# Altium PCB Fuente.PcbDoc
Units mm, origin at the board's own origin, x right, y up, seen from the top; angles counter-clockwise.
Board outline 100 x 100 mm, 2 copper layers (Top Layer, Bottom Layer); 53 components, 29 nets, 133 pads, 32 vias.
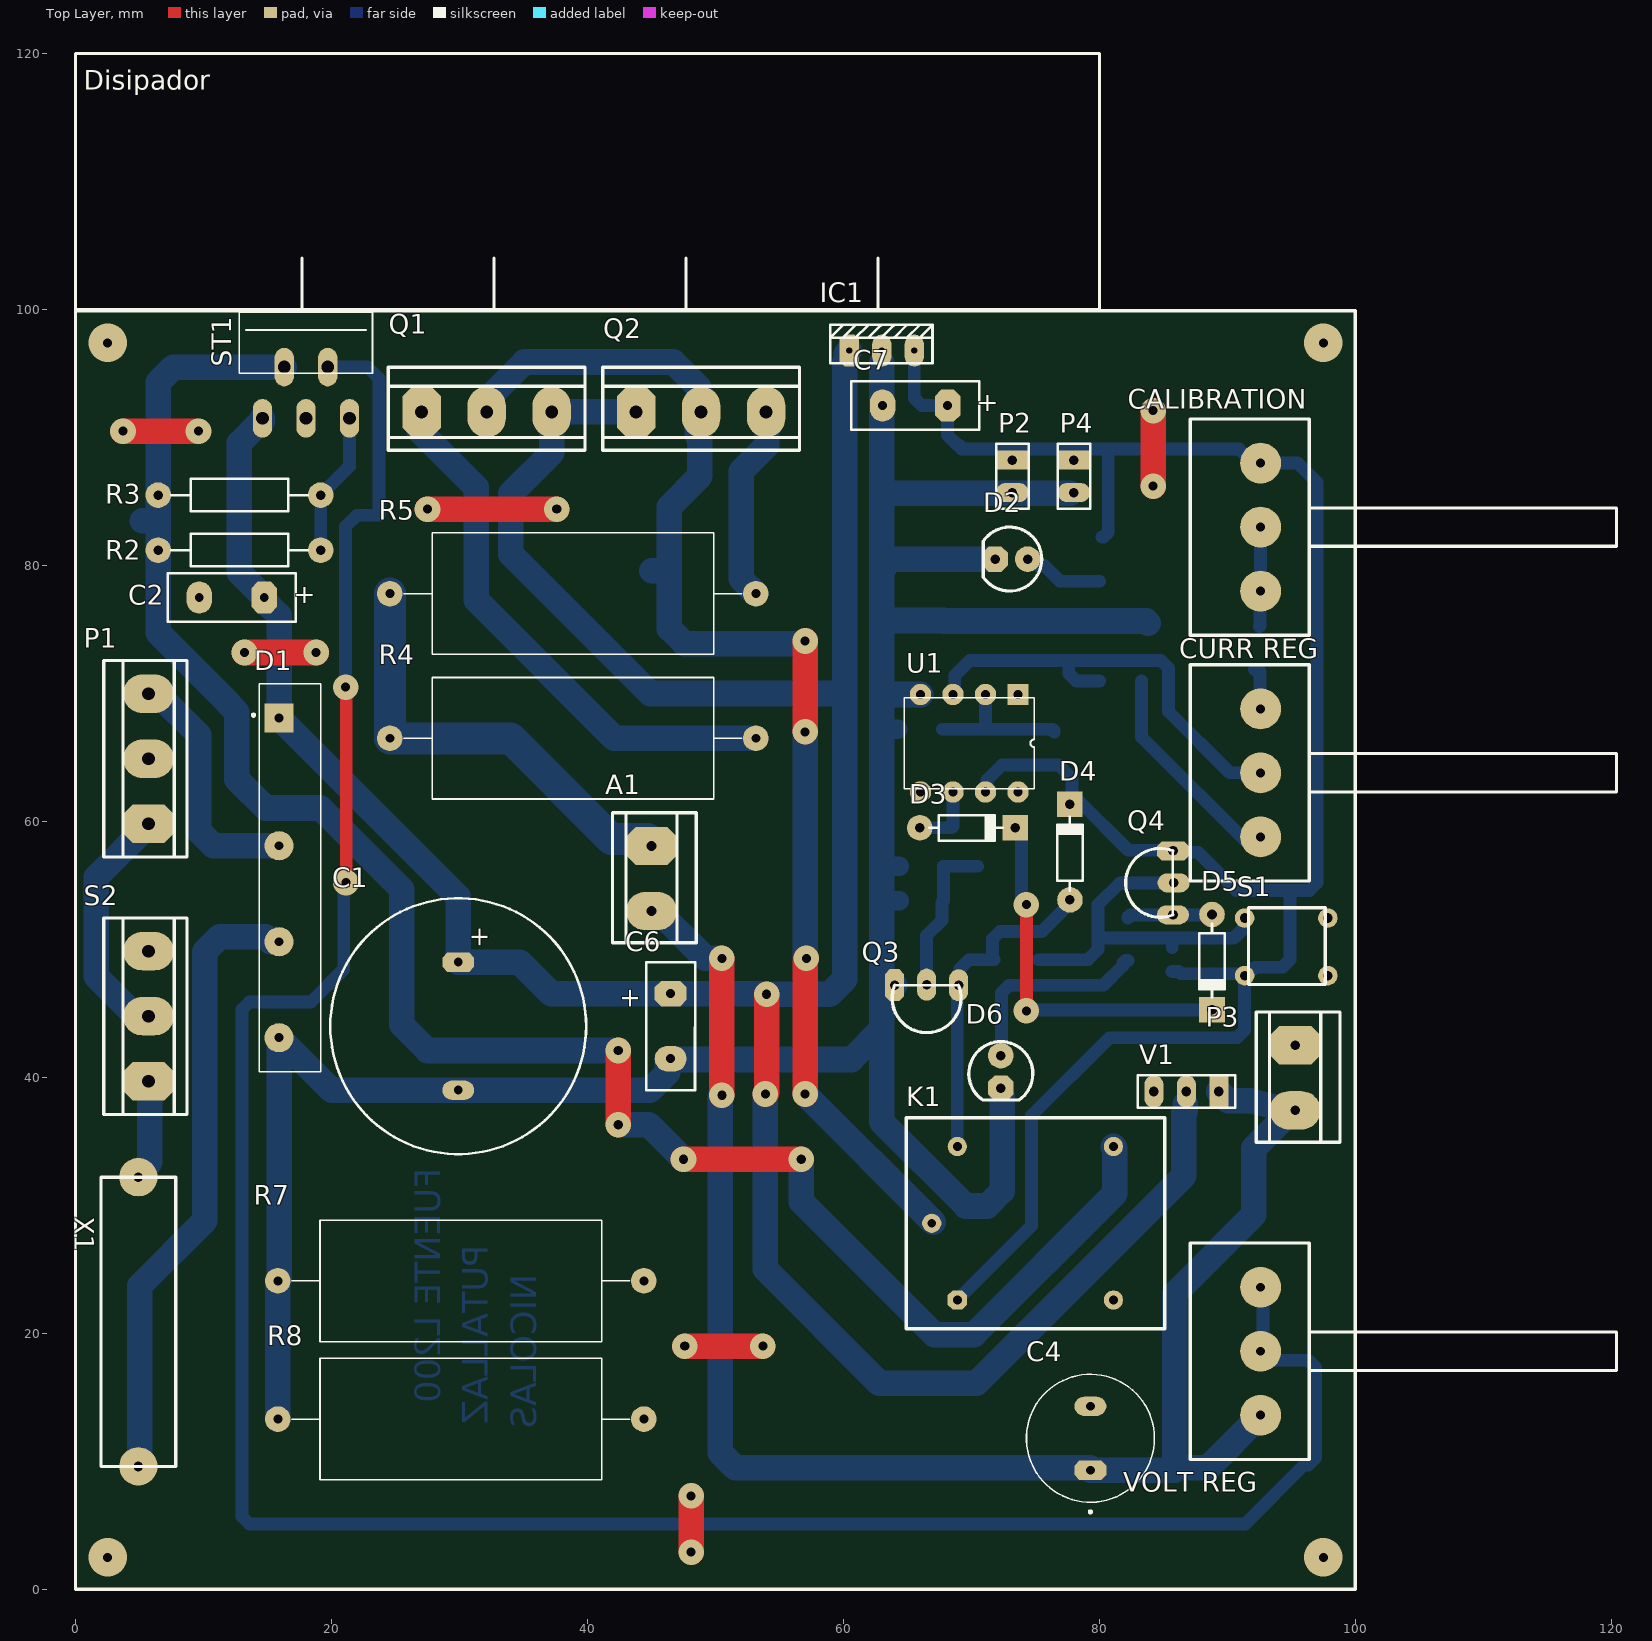
[diagram p0: Top Layer view]
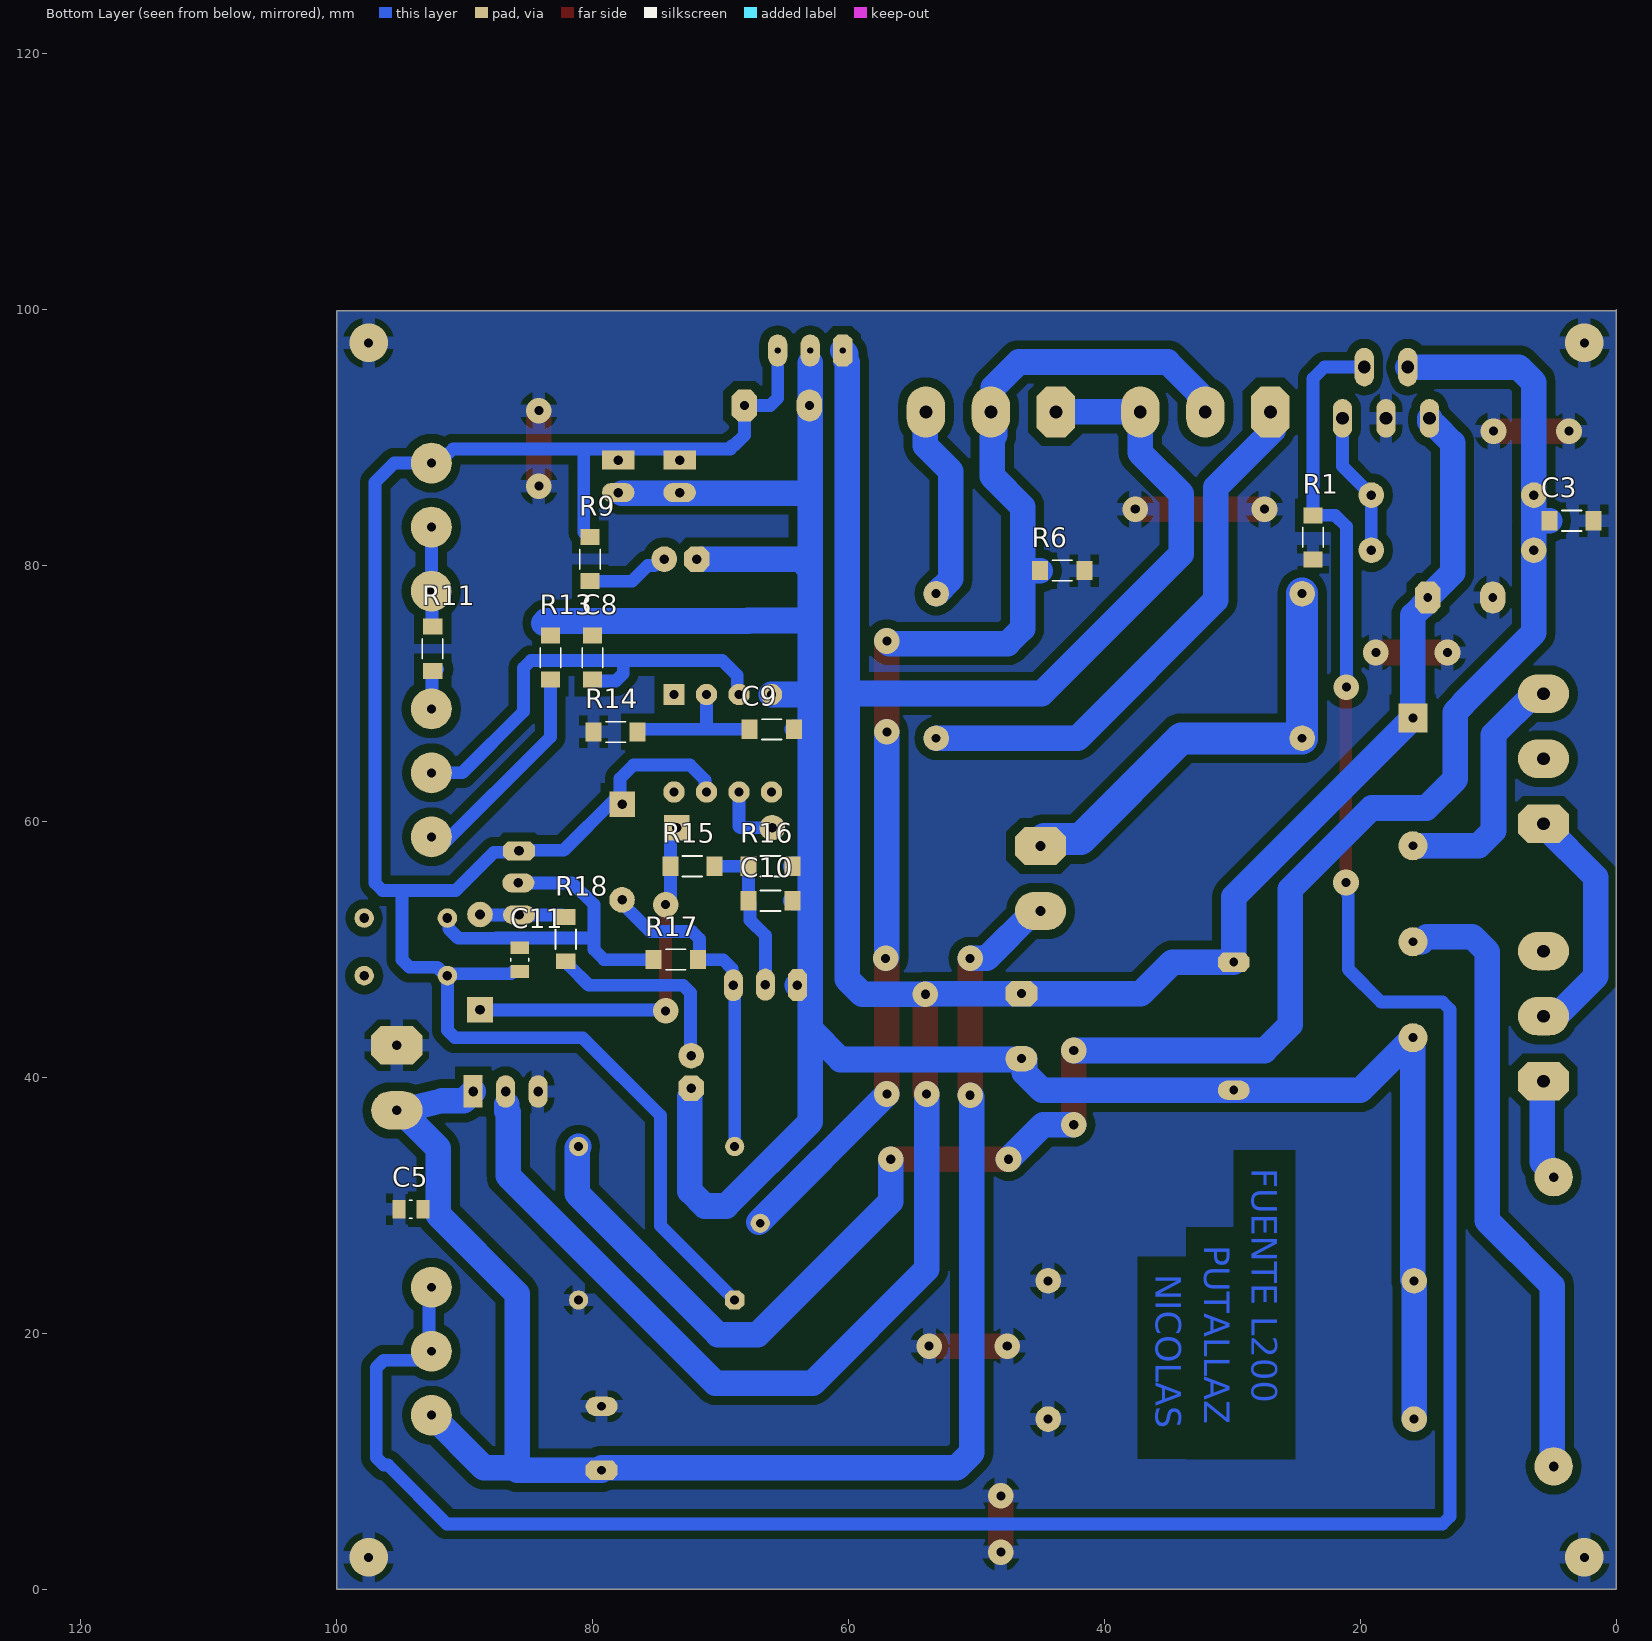
[diagram p1: Bottom Layer view, seen from below]
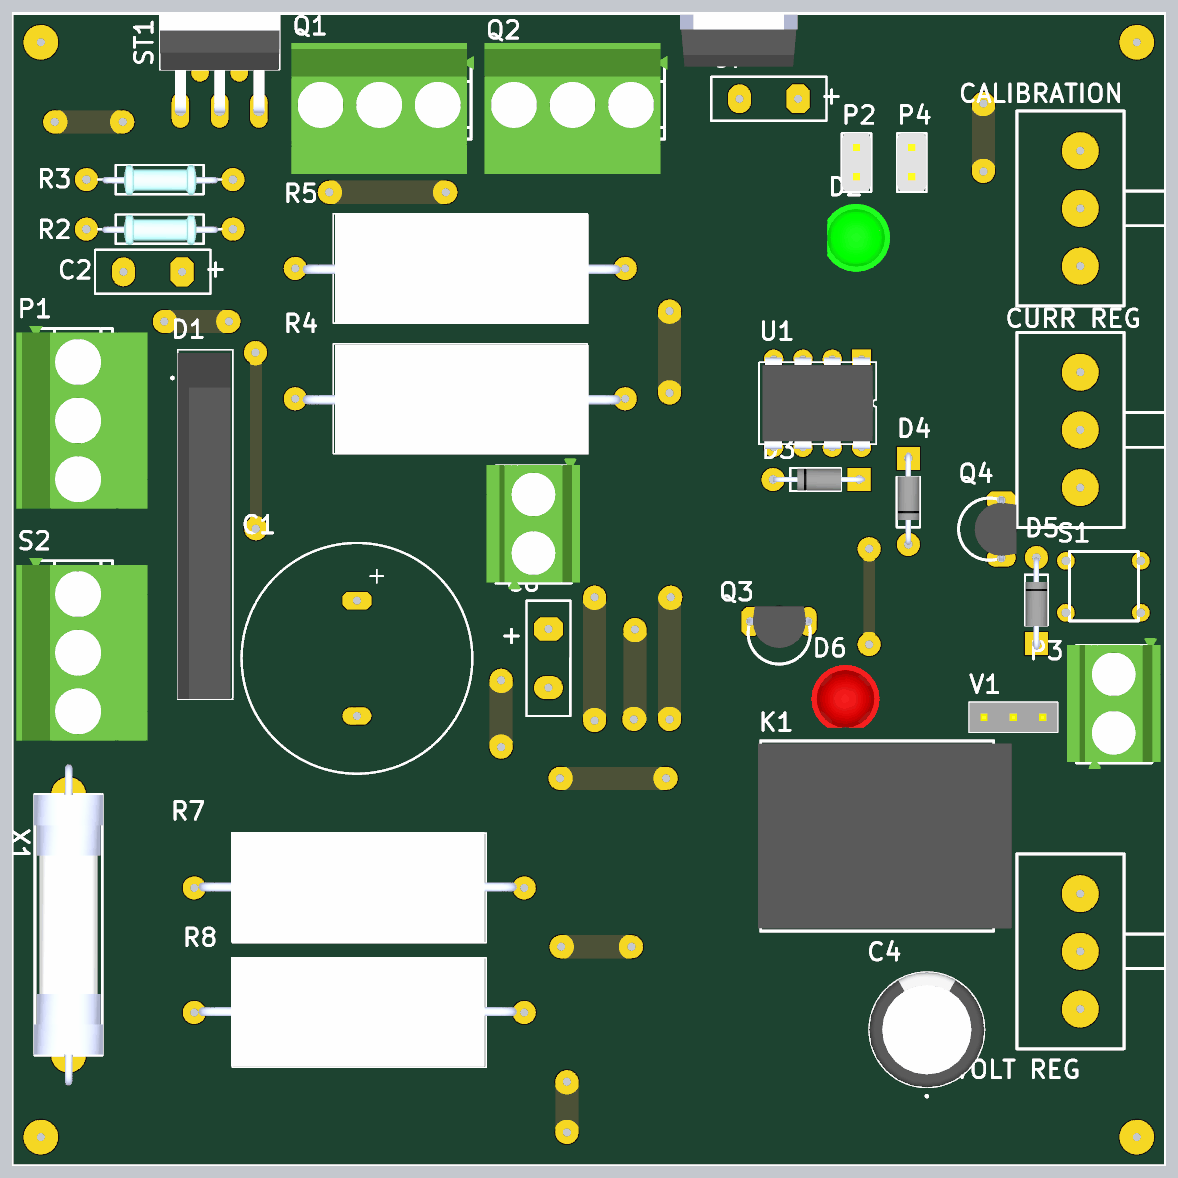
[diagram p2: 3D render of the assembled board from above, using the file's embedded part models]
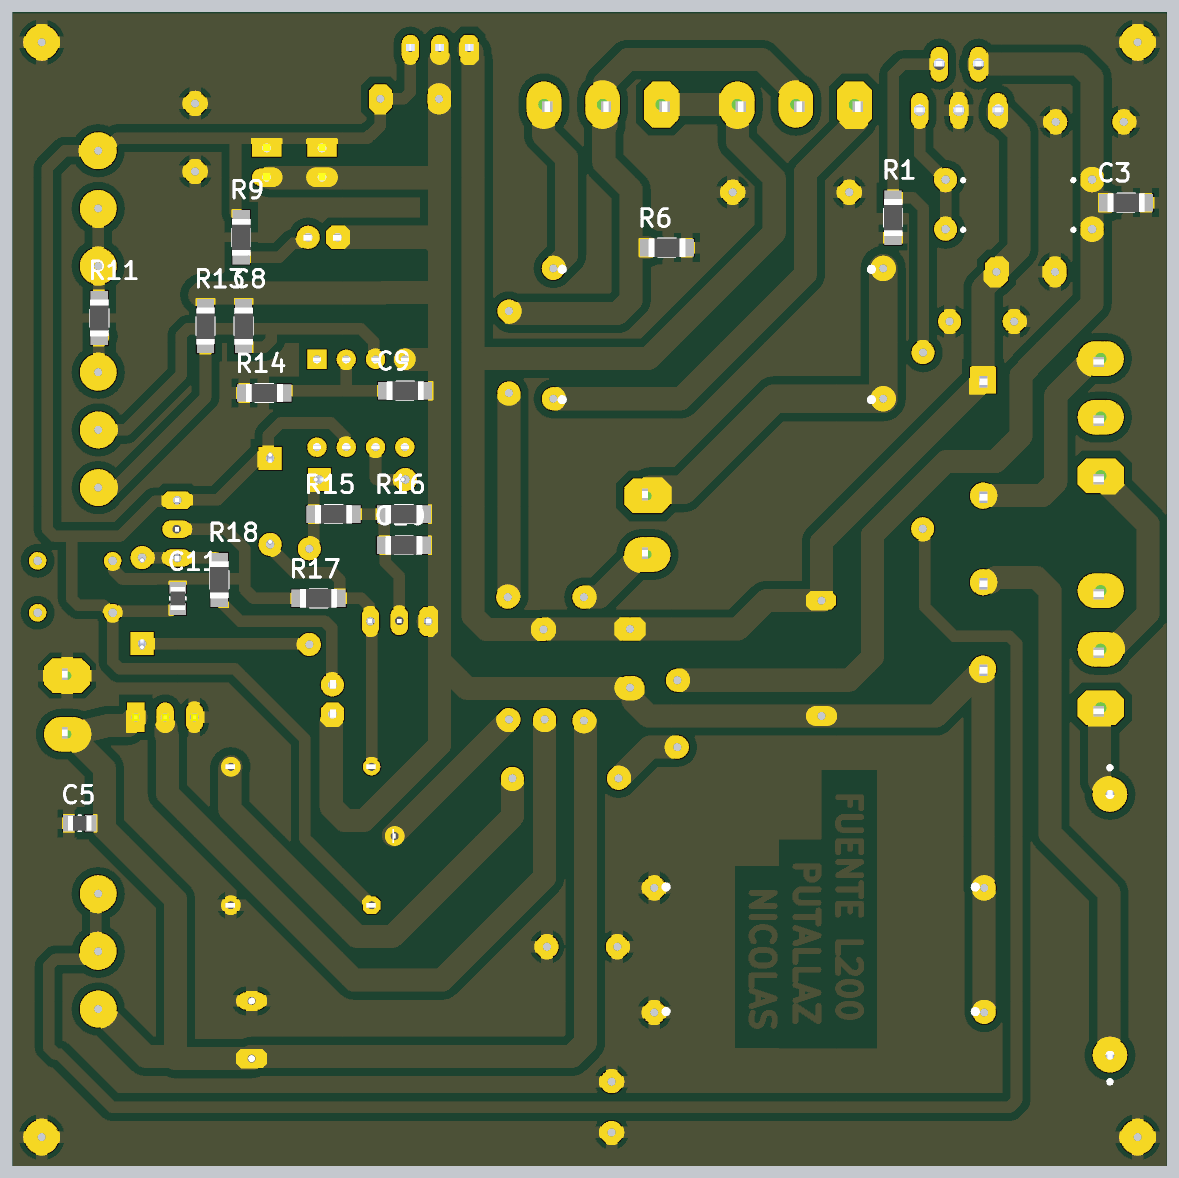
[diagram p3: 3D render of the assembled board from below, using the file's embedded part models]

## Layer stack, top to bottom
Top Solder: solder mask 0.0102, Solder Resist, Dk 3.5
Top Layer: signal copper 0.0356
Dielectric 1: dielectric 0.32, FR-4, Dk 4.8
Bottom Layer: signal copper 0.0356
Bottom Solder: solder mask 0.0102, Solder Resist, Dk 3.5

## Board outline
0,0 0,100 0,99.9 100,99.9 100,0

## Design rules (kind name [scope] priority, off if disabled: settings)
Clearance pistasGruesas [(InNet('GND') OR InNet('-VCC') OR InNet('VCC') OR InNet('VOUT') OR InNet('VREG') OR InNet('L IN') OR InNet('N IN') OR InNet('AMP IN') OR InNet('B BJT') OR InNet('E1') OR InNet('E2'))] p1: gap=0.7 ignorepadtopadclearanceinfootprint=TRUE
Clearance Polygon [InPolygon] p2: gap=1 ignorepadtopadclearanceinfootprint=TRUE
Clearance Clearance_1 [All] p3: gap=0.254 ignorepadtopadclearanceinfootprint=FALSE except(0: Arc-Hole Track-Hole SMDPad-Hole THPad-Hole Via-Hole Fill-Hole Poly-Hole Region-Hole Text-Hole)
Clearance [All] p4: gap=0.254 ignorepadtopadclearanceinfootprint=FALSE except(0: Arc-Hole Track-Hole SMDPad-Hole THPad-Hole Via-Hole Fill-Hole Poly-Hole Region-Hole Text-Hole)
Height [All] p1: minheight=0 maxheight=50 prefheight=12.7
PolygonConnect [All] p1: connectstyle=Relief reliefconductorwidth=1 reliefentries=4 polygonreliefangle="90 Angle" airgapwidth=0.5
RoutingVias [All] p1: holewidth=0.711 width=2 viastyle="Through Hole" minholewidth=0.711 minwidth=2 maxholewidth=0.711 maxwidth=2
SolderMaskExpansion [All] p1: expansion=0.102 istentingtop=FALSE
UnRoutedNet [All] p1: checkbadconnections=TRUE
Width POWER_NET [(InNet('GND') OR InNet('-VCC') OR InNet('VCC') OR InNet('VOUT') OR InNet('VREG') OR InNet('L IN') OR InNet('N IN') OR InNet('AMP IN') OR InNet('B BJT') OR InNet('E1') OR InNet('E2') OR InNet('NetS2_2') OR InNet('NetP1_1') OR InNet('NetS2_1'))] p1: maxlimit=3 minlimit=1.5 preferedwidth=2
Width CONTROL_NET [All] p2: maxlimit=2 minlimit=0.7 preferedwidth=1
28 further rules are at their usual default settings.

## Components (designator, comment, footprint, x,y, rotation, side; value= is the part's Value field where it differs from the comment)
A1 "Amperimetro" "BORNERA 2" 45,58.08 r270 top
C1 "4700uF 50V" "CAP 20MM" 29.9,44 r90 top
C2 "Tantalio" "Cap Tantalio" 12.2,77.5 r180 top value="1uF 40V"
C3 "220nF" "1206 res" 3.5,83.5 r0 bottom
C4 "470uF 50V" "CAP 10mm" 79.3,11.8 r90 top
C5 "100nF" "0805 res" 94.2,29.7 r180 bottom
C6 "Tantalio" "Cap Tantalio" 46.5,44 r270 top value="1uF 40V"
C7 "Tantalio" "Cap Tantalio" 65.6,92.5 r180 top value="10uF 25V"
C8 "220nF" "1206 res" 80,72.8 r270 bottom
C9 "220nF" "1206 res" 66,67.2 r0 bottom
C10 "220nF" "1206 res" 66.1,53.8 r0 bottom
C11 "100nF" "0805 res" 85.7,49.2 r270 bottom
CALIBRATION "100K" Potenciometro 92.6,83 r0 top
"CURR REG" "10K" Potenciometro 92.6,63.8 r0 top
D1 "GBJ2510" DIOB_GBJ2510 16.75,55.6 r270 top
D2 "GREEN" "LED 5MM GREEN" 74.4,80.5 r180 top
D3 "1N4148" DO-38 69.7,59.5 r0 top
D4 "1N4148" DO-38 77.7,57.6 r90 top
D5 "1N4148" DO-38 88.8,49 r270 top
D6 "RED" "LED 5MM" 72.3,41.7 r270 top
IC1 "LM7812" TO220 63,94.3 r0 top
K1 "Relay-SPDT" Relay 66.9,28.6 r0 top
P1 "Trafo 18V" "Bornera 3" 5.7,64.9 r90 top
P2 "Ventilador A" HDR1X2 73.2,88.24 r270 top
P3 "OUT 2.8-24V" "BORNERA 2" 95.3,42.5 r270 top
P4 "Ventilador B" HDR1X2 78,88.24 r270 top
Q1 "2N3771" "Bornera 3" 32.12,92 r0 top
Q2 "2N3771" "Bornera 3" 48.88,92 r0 top
Q3 "BC547" TO-92A 66.5,44.5 r90 top
Q4 "BC557" TO-92A 83.05,55.2 r0 top
R1 "1K3" "1206 res" 23.7,82.2 r90 bottom
R2 "0.51ohm" "Res Axial 0.5" 12.8,81.2 r180 top
R3 "0.51ohm" "Res Axial 0.5" 12.8,85.5 r180 top
R4 "0.1ohm" "RES AXIAL 5W" 38.854,66.5 r180 top
R5 "0.1ohm" "RES AXIAL 5W" 38.854,77.8 r180 top
R6 "1K" "1206 res" 43.3,79.6 r0 bottom
R7 "0.12ohm" "RES AXIAL 5W" 30.1,24.1 r0 top value=5W
R8 "0.12ohm" "RES AXIAL 5W" 30.1,13.3 r0 top value=5W
R9 "680ohm" "1206 res" 80.2,80.5 r90 bottom
R11 "180K" "1206 res" 92.5,73.5 r90 bottom
R13 "100ohm" "1206 res" 83.3,72.8 r270 bottom
R14 "47K" "1206 res" 78.2,67 r0 bottom
R15 "10K" "1206 res" 72.2,56.5 r180 bottom
R16 "2k2" "1206 res" 66.1,56.5 r0 bottom
R17 "1K" "1206 res" 73.5,49.2 r0 bottom
R18 "680ohm" "1206 res" 82.1,50.8 r90 bottom
S1 "SW-PB" Pulsador 94.6,50.2 r0 top
S2 "SW-SPDT" "Bornera 3" 5.7,44.78 r90 top
ST1 "L200" PENTAWATT 18,91.5 r0 top
U1 "Amplificador Operacional" DIP8 66.02,62.3 r270 top
V1 "Voltimetro" HDR1X3 89.34,38.9 r180 top
"VOLT REG" "Pote Lineal" Potenciometro 92.6,18.6 r0 top
X1 "Fuse" Fusiblera 4.9,20.9 r270 top

## Footprints (in the part's own frame and the unit in brackets; to place one, negate y for a bottom-side part, rotate by r counter-clockwise, add the part's x,y. Pads: shape width x height; smd on the part's side, far side on the other; paste and mask are expansions set on the pad)
"0805 res" [mm]
  rect 1x1.42 smd: 1(-0.935,0) 2(0.935,0)
  silkscreen extent -0.12,-0.7 0.12,0.7, body extent -1,-0.63 1,0.63, height 0.6
"1206 res" [mm]
  rect 1.25x1.5 smd: 1(-1.725,0) 2(1.725,0)
  silkscreen extent -0.78,-0.8 0.78,0.8, body extent -1.6,-0.8 1.6,0.8, height 0.6
"BORNERA 2" [mm]
  oct 3x4 hole 0.75: 1(0,0)
  oval 3x4 hole 0.75: 2(5.08,0)
  silkscreen extent -2.6,-3.05 7.56,3.5, body extent -3.26,-3.85 8.1,4.25, height 10
"Bornera 3" [mm]
  oct 3x4 hole 1: 1(-5.08,0)
  oval 3x4 hole 1: 2(0,0) 3(5.08,0)
  silkscreen extent -7.68,-3 7.68,3.5, body extent -7.91,-6.03 7.93,5.32, height 18
"CAP 10mm" [mm]
  oct 1.5x2.5 hole 0.7: 1(-2.5,0)
  oval 1.5x2.5 hole 0.7: 2(2.5,0)
  silkscreen extent -5.85,-5 5,5, body extent -5,-5 5,5, height 20
"CAP 20MM" [mm] "Polarized Capacitor (Radial); 2 Leads"
  oct 1.5x2.5 hole 0.7: 1(5,0)
  oval 1.5x2.5 hole 0.7: 2(-5,0)
  silkscreen extent -10,-10 10,10, body extent -10,-9.99 10,9.99, height 40
"Cap Tantalio" [mm] "Radial Cap, Thru-Hole; 2 Leads; 0.2 in Pin Spacing"
  oct 2x2.5 hole 0.7: 1(-2.54,0)
  oval 2x2.5 hole 0.7: 2(2.54,0)
  silkscreen extent -5,-1.91 5,1.91, body extent -5,-2 5,2, height 0.25
DIOB_GBJ2510 [mm]
  rect 2.27x2.27 hole 0.7: 1(-12.5,-0.85)
  round 2.27 hole 0.7: 2(-2.5,-0.85) 3(5,-0.85) 4(12.5,-0.85)
  silkscreen extent -15.15,-2.95 15.15,2.4, body extent -14.86,-2.43 15.14,2.17, height 24.5
DIP8 [mil]
  rect 66x66 hole 27.56: 1(-300,300)
  round 66 hole 27.56: 2(-300,200) 3(-300,100) 4(-300,0) 5(0,0) 6(0,100) 7(0,200) 8(0,300)
  silkscreen extent -290,-50 -10,350, body extent -306,-39 6,339, height 210
DO-38 [mm] "Diode, Axial; Body 5.2 x 2.7 mm (LxDia. max), Lead Dia. 0.86 mm (max)"
  round 2 hole 0.75: 1(-3.73,0)
  rect 2x2 hole 0.75: 2(3.73,0)
  silkscreen extent -3,-1 2.75,1, body extent -3.73,-0.95 4.28,0.95, height 1.91
Fusiblera [mm]
  round 3 hole 0.762: 1(-11.3,0) 2(11.3,0)
  silkscreen extent -11.3,-2.92 11.3,2.92, body extent -13.94,-3 13.94,3, height 6
HDR1X2 [mm] "Connector; Header; 2 Position"
  rect 1.5x2.54 hole 0.75: 1(0,0)
  oval 1.5x2.54 hole 0.75: 2(2.54,0)
  silkscreen extent -1.27,-1.27 3.81,1.27, body extent -1.28,-1.27 3.75,1.27, height 11.94
HDR1X3 [mm]
  rect 1.5x2.54 hole 0.75: 1(0,0)
  oval 1.5x2.54 hole 0.75: 2(2.54,0) 3(5.08,0)
  silkscreen extent -1.27,-1.27 6.35,1.27, body extent -1.27,-1.27 6.35,1.27, height 8.38
"LED 5MM" [mm]
  round 2 hole 0.75: 1(0,0)
  oct 2x2 hole 0.75: 2(2.54,0)
  silkscreen extent -1.09,-2.5 3.48,2.5, body extent -1.72,-3 3.72,2.9, height 9.6
"LED 5MM GREEN" [mm] "LED; 2 Leads"
  round 2 hole 0.75: 1(0,0)
  oct 2x2 hole 0.75: 2(2.54,0)
  silkscreen extent -1.09,-2.5 3.48,2.5, body extent -1.72,-2.9 3.72,3, height 9.6
PENTAWATT [mm]
  oval 1.508x3.016 hole 1: 1(-3.4,0) 2(-1.7,4) 3(0,0) 4(1.7,4) 5(3.4,0)
  silkscreen extent -5.2,3.52 5.2,8.27, body extent -5.19,-0.19 5.21,8.31, height 21.15
Potenciometro [mm]
  round 3.2 hole 0.7: 1(0,5) 2(0,0) 3(0,-5)
  silkscreen extent -5.5,-8.45 27.8,8.45
Pulsador [mil]
  round 60 hole 30: 1(-127.95,88.58) 2(-127.95,-88.58) 3(127.95,88.58) 4(127.95,-88.58)
  silkscreen extent -116,-116 120,120
Relay [mm]
  oct 1.5x1.5 hole 0.7: 1(2,-6)
  round 1.5 hole 0.7: 2(2,6) 3(0,0) 4(14.2,6) 5(14.2,-6)
  silkscreen extent -2,-8.25 18.2,8.25, body extent -2.25,-8 19.75,8, height 16
"Res Axial 0.5" [mm] "Axial Device, Thru-Hole; 2 Leads; 0.5 in Pin Spacing"
  round 2 hole 0.75: 1(-6.35,0) 2(6.35,0)
  silkscreen extent -5.33,-1.27 5.33,1.27, body extent -5.1,-1.25 5,1.35, height 2.59
"RES AXIAL 5W" [mm]
  round 2 hole 0.7: 1(-14.3,0) 2(14.3,0)
  silkscreen extent -13.19,-4.75 13.19,4.75, body extent -13.93,-4.67 13.67,4.83, height 9
TO220 [mm] "Encapsulado TO220"
  oct 1.5x2.5 hole 0.5: 1(-2.54,2.5)
  oval 1.5x2.5 hole 0.5: 2(0,2.5) 3(2.54,2.5)
  silkscreen extent -4.04,1.5 3.96,4.5, body extent -5.1,1 5.1,5.5, height 19.65
TO-92A [mm] "TO, Flat Index; 3 In-Line, Axial Leads; Body Dia. 4.5mm; Leads 0.51 x 0.48 mm (max)"
  oval 2.5x1.5 hole 0.75: 1(2.7,-2.5) 2(2.75,0)
  oct 2.5x1.5 hole 0.75: 3(2.7,2.5)
  silkscreen extent -1,-2.69 2.7,2.69, body extent 0.4,-2.75 4,2.73, height 8.09

## Part data
A1 P3: library part Bornera, "Header, 2-Pin", LatestRevisionDate=17-Jul-2002, LatestRevisionNote="Re-released for DXP Platform.", Publisher="Altium Limited"
C1 C2 C4 C6 C7: library part "Cap Pol1", "Polarized Capacitor (Radial)", LatestRevisionDate=17-Jul-2002, LatestRevisionNote="Re-released for DXP Platform.", PackageDescription="Polarized Capacitor (Radial); 2 Leads", PackageReference=RB7.6-15, Published=8-Jun-2000, Publisher="Altium Limited"
C3 C5 C8 C9 C10 C11: library part Cap, "Capacitor", LatestRevisionDate=17-Jul-2002, LatestRevisionNote="Re-released for DXP Platform.", PackageDescription="Radial Cap, Thru-Hole; 2 Leads; 0.3 in Pin Spacing", PackageReference=RAD-0.3, Published=8-Jun-2000, Publisher="Altium Limited"
CALIBRATION "CURR REG" "VOLT REG": library part Potenciometro
D1: library part Bridge1, "Full Wave Diode Bridge", DatasheetVersion=E2732B, LatestRevisionDate=29-May-2009, LatestRevisionNote="Sch pins A & K swapped.", PackageDescription="Bridge Rectifier; 4 Terminals; Body 9.4 x 9.4 mm (typ); Pitch 5.08 mm", PackageReference=D-38, Published=8-Jun-2000, Publisher="Altium Limited"
D2 D6: library part LED5, "Typical BLUE SiC LED", DatasheetVersion=16-Apr-2002, LatestRevisionDate=17-Dec-2003, LatestRevisionNote="PCB Footprint replaced.", PackageDescription="SM LED; 2 C-Bend Leads; Body 3.5 x 2.8 x 1.9 mm, inc leads (LxWxH typ)", PackageReference=3.5X2.8X1.9, PackageVersion=16-Apr-2002, Published=8-Jun-2000, Publisher="Altium Limited"
D3 D4 D5: library part "Diode 1N4007", "1 Amp General Purpose Rectifier", Code_JEDEC=DO-204-AL, ComponentLink1Description="Manufacturer Link", ComponentLink1URL=http://www.fairchildsemi.com/, ComponentLink2Description=Datasheet, ComponentLink2URL=http://www.fairchildsemi.com/ds/1N%2F1N4001.pdf, DatasheetVersion=1998, LatestRevisionDate=17-Jul-2002, LatestRevisionNote="Re-released for DXP Platform.", PackageDescription="Diode, Axial; Body 5.2 x 2.7 mm (LxDia. max), Lead Dia. 0.86 mm (max)", PackageReference=DO-41, PackageVersion=Aug-1999, Published=8-Jun-2000, Publisher="Altium Limited"
K1: "Single-Pole Dual-Throw Relay", LatestRevisionDate=17-Jul-2002, LatestRevisionNote="Re-released for DXP Platform.", PackageReference=MODULE5B, Published=24-Mar-1999, Publisher="Altium Limited"
P1: library part "Bornera 3pin", "Header, 3-Pin", LatestRevisionDate=17-Jul-2002, LatestRevisionNote="Re-released for DXP Platform.", Publisher="Altium Limited"
P2 P4: library part "Header 2", "Header, 2-Pin", LatestRevisionDate=17-Jul-2002, LatestRevisionNote="Re-released for DXP Platform.", Publisher="Altium Limited"
Q1 Q2: library part BC547, "NPN General Purpose Amplifier", ComponentLink1Description="Manufacturer Link", ComponentLink1URL=http://www.fairchildsemi.com/, ComponentLink2Description=Datasheet, ComponentLink2URL=http://www.fairchildsemi.com/ds/2N%2F2N3904.pdf, DatasheetVersion=1997, LatestRevisionDate=15-Jan-2003, LatestRevisionNote="PCB Footprint 'BCY-W3/D4.7' replaced", PackageDescription="TO, Flat Index; 3 In-Line, Axial Leads; Body Dia. 4.5mm; Leads 0.51 x 0.48 mm (max)", PackageReference=TO-92A, PackageVersion=Sep-1998, Published=8-Jun-2000, Publisher="Altium Limited"
Q3: "NPN General Purpose Amplifier", ComponentLink1Description="Manufacturer Link", ComponentLink1URL=http://www.fairchildsemi.com/, ComponentLink2Description=Datasheet, ComponentLink2URL=http://www.fairchildsemi.com/ds/2N%2F2N3904.pdf, DatasheetVersion=1997, LatestRevisionDate=15-Jan-2003, LatestRevisionNote="PCB Footprint 'BCY-W3/D4.7' replaced", PackageDescription="TO, Flat Index; 3 In-Line, Axial Leads; Body Dia. 4.5mm; Leads 0.51 x 0.48 mm (max)", PackageReference=TO-92A, PackageVersion=Sep-1998, Published=8-Jun-2000, Publisher="Altium Limited"
Q4: library part "BJT PNP GP", "Bipolar PNP 3 Pins Transistor Gummel-Poon Model", AF=0, BF=100, BR=1, CJC=0, CJE=0, CJS=0, CTC=0, CTE=0, CTS=0, EG=1.11, FC=0.5, IKF=0, IKR=0, IRB=0, IS=1e-16, ISC=0, ISE=0, ISS=0, ITF=0, KF=0, MJC=0.33, MJE=0.33, MJS=0, NC=2, NE=1.5, NF=1, NKF=0.5, NR=1, NS=1, PTF=0, RB=0, RBM=0, RC=0, RE=0, SimulationGenericComponent=True, SUBS=1, TBF1=0, TBF2=0, TBR1=0, TBR2=0, TF=0, TIKF1=0, TIKF2=0, TIKR1=0, TIKR2=0, TIRB1=0, TIRB2=0, TIS1=0, TIS2=0, TISC1=0, TISC2=0, TISE1=0, TISE2=0, TITF1=0, TITF2=0, TLEV=0, TLEVC=0, TMJC1=0, TMJC2=0, TMJE1=0, TMJE2=0, TMJS1=0, TMJS2=0, TNC1=0, TNC2=0, TNE1=0, TNE2=0, TNF1=0, TNF2=0, TNOM=27, TNR1=0, TNR2=0, TNS1=0, TNS2=0, TR=0, TRB1=0, TRB2=0, TRC1=0, TRC2=0, TRE1=0, TRE2=0, TRM1=0, TRM2=0, TTF1=0, TTF2=0, TTR1=0, TTR2=0, TVAF1=0, TVAF2=0, TVAR1=0, TVAR2=0, TVJC=0, TVJE=0, TVJS=0, VAF=0, VAR=0, VBC_MAX=1e99, VBE_MAX=1e99, VCE_MAX=1e99, VJC=0.75, VJE=0.75, VJS=0.75, VTF=0, XCJC=1, XTB=0, XTF=0, XTI=3
R1 R2 R3 R4 R5 R6 R7 R8 R9 R11 R13 R14 R15 R16 R17 R18: library part Res1, "Resistor", LatestRevisionDate=17-Jul-2002, LatestRevisionNote="Re-released for DXP Platform.", PackageDescription="Axial Device, Thru-Hole; 2 Leads; 0.3 in Pin Spacing", PackageReference=AXIAL-0.3, Published=8-Jun-2000, Publisher="Altium Limited"
S1: library part SW-PNA, "Switch", LatestRevisionDate=17-Jul-2002, LatestRevisionNote="Re-released for DXP Platform.", PackageDescription="Switch; 2 Leads", PackageReference=SPST-2, Published=24-Mar-1999, Publisher="Altium Limited"
S2: "SPDT Subminiature Toggle Switch, Right Angle Mounting, Vertical Actuation", ComponentLink1Description="Manufacturer Link", ComponentLink1URL=http://www.apem.com, DatasheetVersion=05-Dec-2000, LatestRevisionDate=17-Dec-2003, LatestRevisionNote="Schematic revised, PCB Footprint replaced.", PackageDescription="Switch; 4 Leads", PackageReference=TL36WW15050, Published=24-Mar-1999, Publisher="Altium Limited"
U1: library part "OpAmp with power terminals", "Ideal Operational Amplifier", SimulationGenericComponent=True
V1: library part "Header 3", "Header, 3-Pin", LatestRevisionDate=17-Jul-2002, LatestRevisionNote="Re-released for DXP Platform.", Publisher="Altium Limited"
X1: library part Fuse_1, CURRENT=1, RESISTANCE=1m, SimulationGenericComponent=True

## Via types
v1: diameter 2, hole 0.711, Top Layer to Bottom Layer, 28 vias
v2: diameter 3, hole 0.7, Top Layer to Bottom Layer, 4 vias

## Nets (pads, with @x,y where several pads share a name; then routed paths per layer and width w, separated by ;. In a path a pad name is that pad's centre, name@x,y a point inside that pad or via, vN(x,y) a via of type N, cw(c..) or ccw(c..) an arc to the next point about the centre after c; other vN are vias at no path point)
+12: C7.1 C11.2 CALIBRATION.1 D4.2 IC1.3 K1.1 P2.1 P4.1 Q4.3 R9.2 S1.2 U1.7 | length 167.7
  Bottom Layer w1: IC1.3 65.54,93.086 66.126,92.5 C7.1 68.14,90.185 68.975,89.35 69.1,89.35 69.225,89.225 69.225,89.1 73.2,89.1 ; K1.1 74.699,28.399 74.699,37.01 80.789,43.1 90.764,43.1 91.35,43.686 S1.2 ; U1.7 71.229,62.429 71.229,63.229 72.4,64.4 76.8,64.4 77.85,63.35 77.85,61.48 D4.2 ; P2.1 73.2,89.1 ; P4.1 78,89.1 ; D4.2@78.318,61.682 82.252,57.748 85.002,57.748 85.15,57.6 87.7,57.6 90.7,54.6 94.9,54.6 ; R9.2 80.325,82.225 80.7,82.6 80.7,89.1 ; C11.2@85.685,48.265 C11.2 86.203,48.265 86.368,48.1 90.829,48.1 90.879,48.05 91.25,48.05 S1.2 ; 73.2,89.1 78,89.1 ; 78,89.1 80.7,89.1 ; 80.7,89.1 90.914,89.1 92.014,88 95.5,88 97,86.5 97,55.186 96.414,54.6 94.9,54.6 ; S1.2 91.492,47.95 92.142,48.6 94.314,48.6 94.9,49.186 94.9,54.6
-VCC: C1.2 C6.2 C7.2 C8.1 C9.1 C10.1 D1.4 D2.2 D6.2 IC1.2 P2.2 P4.2 Q3.3 R7.1 R8.1 R13.1 R16.1 U1.4 | length 213.2
  Bottom Layer w1.5: 63,53.8 C10.1 ; 63,56.5 R16.1 ; 63,67.2 C9.1
  Bottom Layer w2: R8.1 R7.1 15.9,24.2 D1.4 20,39 C1.2 44.878,39 46.25,40.372 46.25,41.46 C6.2 ; C6.2@46.5,41.4 60.628,41.4 63,43.772 ; IC1.2@63,95.856 63,85.4 ; Q3.3 63.9,47.3 63,47.3 ; U1.4 63,69.92 ; 67.86,75.66 83.64,75.66 83.8,75.5 ; 67.86,75.7 63,75.7 ; D2.2@71.5,80.5 63.8,80.5 63,79.7 ; D6.2@72.4,38.5 72.4,31.118 71.228,29.947 69.572,29.947 63,36.518 63,43.772 ; P4.2@77.73,85.66 63.26,85.66 63,85.4 ; 63,43.772 63,47.3 ; 63,47.3 63,53.8 63,56.5 63,67.2 63,69.92 ; 63,69.92 63,75.7 ; 63,75.7 63,79.7 ; 63,79.7 63,85.4
"AMP IN": A1.1 R4.2 R5.2 | length 34.8
  Bottom Layer w2.5: R5.2 R4.2 34,66.5 41.883,58.617 44.684,58.617 A1.1@44.771,58.53
"B BJT": K1.3 Q1.2 Q2.2 R6.2 | length 101
  Top Layer w2: v1(57,38.7) 57,49.2 v1(57.1,49.3) ; v1(57,67) v1(57,74.1)
  Bottom Layer w2: Q1.2@32.078,92.728 32.62,93.271 32.62,93.448 35.072,95.9 46.7,95.9 48.689,93.911 Q2.2@48.689,92.191 ; R6.2 46.4,79.6 46.4,75.072 47.572,73.9 56.8,73.9 v1(57,74.1) ; 46.4,79.836 46.4,84.6 48.78,86.98 48.78,90 ; Q2.2@48.589,90.191 Q2.2@48.589,92.74 ; v1(57,38.7) K1.3@67.018,28.682 ; v1(57,67) 57,49.4 v1(57.1,49.3)
E1: Q1.1 R4.1 | length 41.4
  Bottom Layer w2: Q1.1@26.834,90.566 31.3,86.1 31.3,77.3 42.1,66.5 R4.1
E2: Q2.3 R5.1 | length 14.4
  Bottom Layer w2: R5.1 52,78.954 52,87.369 54,89.369 Q2.3@54,90.913
GND: C2.2 C3.1 C4.2 C5.1 K1.5 P3.1 R1.1 R6.1 R7.2 R8.2 R14.2 ST1.3 V1.3 | length 37.8
  Top Layer w2: v1(3.7,90.5) v1@9.4,90.5 ; v1(13.2,73.2) v1(18.8,73.2) ; v1(27.5,84.4) v1(37.6,84.4) ; v1(47.6,19) v1(53.7,19) ; v1(48.1,2.9) v1(48.1,7.3) ; v1(84.2,86.2) v1(84.2,92.1)
  other v1: 9.6,90.5
  other v2: 2.5,2.5 97.5,2.5 2.5,97.4 97.5,97.4
"L IN": D1.3 X1.2 | length 48
  Bottom Layer w2: X1.2@5,9.812 5,23.7 10.1,28.8 10.1,49.828 11.272,51 14.827,51 15.227,50.6 D1.3@15.3,50.6
"N IN": D1.2 P1.3 | length 19.5
  Bottom Layer w2: P1.3 6.404,69.98 9.6,66.784 9.6,59.272 10.772,58.1 D1.2
NetC8_2: "CURR REG.2" C8.2 U1.3 | length 35
  Bottom Layer w1: U1.3@68.7,69.641 68.689,69.651 68.689,70.528 68.7,70.538 68.7,71.4 69.865,72.565 77.6,72.565 ; C8.2@80,70.975 78.186,70.975 77.6,71.561 77.6,72.565 ; 92.2,63.8 90.186,63.8 85.4,68.586 85.4,71.979 84.814,72.565 77.6,72.565
NetC9_2: C9.2 R14.1 U1.2 | length 11.6
  Bottom Layer w1: C9.2 71.1,67.2 ; U1.2 71.1,67.2 ; R14.1 76.475,67.075 76.35,67.2 71.1,67.2
NetC10_2: C10.2 Q3.2 R15.2 R16.2 | length 12.4
  Bottom Layer w1: Q3.2 66.5,51.085 67.7,52.285 67.7,53.55 67.7,53.675 C10.2 R16.2 R15.2
NetC11_1: C11.1 Q4.2 R17.2 S1.1 | length 27.9
  Bottom Layer w1: R17.2 79.1,49.2 79.9,50 79.9,50.6 ; Q4.2@85.2,55.2 81.6,55.2 79.9,53.5 79.9,50.6 ; C11.1 85.7,50.9 ; S1.1 91.25,52.35 91.25,51.62 90.505,50.876 87.573,50.876 87.549,50.9 85.7,50.9 ; 79.9,50.6 80.2,50.9 85.7,50.9
NetCALIBRATION_2: CALIBRATION.2 CALIBRATION.3 R11.2 | length 7.8
  Bottom Layer w1: R11.2 92.55,75.275 92.55,77.95 CALIBRATION.3 CALIBRATION.2
"NetCURR REG_1": "CURR REG.1" R11.1 | length 3.1
  Bottom Layer w1: R11.1@92.1,71.9 R11.1@92.15,71.85 ; R11.1 92.55,71.725 92.55,68.85 92.6,68.8
"NetCURR REG_3": "CURR REG.3" R13.2 | length 16.7
  Bottom Layer w1: R13.2@83.3,70.968 83.3,66.6 92,57.9
NetD2_1: D2.1 R9.1 | length 6.3
  Bottom Layer w1: D2.1 74.671,80.5 75.171,80 75.697,80 76.922,78.775 R9.1@80,78.775
NetD3_1: D3.1 U1.6 | length 5.3
  Bottom Layer w1: D3.1 68.46,59.5 68.565,59.605 68.565,62.295 U1.6
NetD3_2: D3.2 D5.2 R15.1 | length 28.7
  Top Layer w1: v1(74.3,45.2) v1(74.3,53.5)
  Bottom Layer w1: D3.2 73.925,59.005 73.925,54.146 74.3,53.771 v1(74.3,53.5) ; v1(74.3,45.2) 74.37,45.27 D5.2@88.3,45.27
NetD4_1: D4.1 K1.2 Q3.1 R17.1 | length 26.1
  Bottom Layer w1: K1.2 68.9,47.2 69.096,47.396 69.096,48.479 69.817,49.2 R17.1 71.657,49.318 71.657,50.814 72.243,51.4 75.5,51.4 77.7,53.6 D4.1
NetD5_1: D5.1 Q4.1 R18.2 | length 6.7
  Bottom Layer w1: R18.2@82.225,52.45 82.225,52.525 82.4,52.7 D5.1@88.77,52.7
NetD6_1: D6.1 R18.1 | length 16
  Bottom Layer w1: D6.1 72.351,41.751 72.351,46.614 72.937,47.2 80.3,47.2 81.85,48.75 81.85,48.95 82.037,49.137 R18.1@82.237,49.137
NetP1_1: P1.1 S2.2 | length 18
  Bottom Layer w2: S2.2@4.657,44.843 1.6,47.9 1.6,55.62 P1.1@5.8,59.82
NetR1_2: "VOLT REG.1" "VOLT REG.2" R1.2 ST1.4 | length 204.3
  Top Layer w1: v1(21.1,70.5) 21.15,70.45 21.15,55.25 v1(21.132,55.232)
  Bottom Layer w1: ST1.4 22.814,95.5 23.7,94.614 R1.2 21.986,83.925 21.1,83.039 v1(21.1,70.5) ; v1(21.132,55.232) 21.009,55.109 21.009,54.323 20.956,54.27 20.956,48.456 18.4,45.9 13.586,45.9 13,45.314 13,5.686 13.586,5.1 91.4,5.1 96,9.7 96.314,9.7 96.9,10.286 96.9,17.314 96.314,17.9 92.796,17.9 92.796,22.984
NetR2_1: R2.1 R3.1 ST1.5 | length 11.2
  Bottom Layer w1: R2.1 R3.1 21.4,87.75 ST1.5
NetS2_1: S2.1 X1.1 | length 7.9
  Bottom Layer w2: X1.1 4.9,32.471 5.8,33.371 5.8,39.6 S2.1
VCC: C1.1 C2.1 C6.1 D1.1 IC1.1 Q1.3 Q2.1 ST1.1 V1.2 | length 250.9
  Top Layer w2: v1(53.9,38.7) 54,38.8 v1(54,46.5)
  Bottom Layer w2: ST1.1 14.6,91.238 14.354,90.992 14.218,90.992 12.8,89.574 12.8,79.44 14.49,77.75 14.74,77.75 C2.1 ; C2.1@14.74,77.49 14.74,77.25 15.9,76.09 D1.1 ; D1.1@16.035,67.965 29.9,54.1 C1.1@29.9,49.1 ; C1.1 34.7,49 37.16,46.54 C6.1 53.96,46.54 v1(54,46.5) 58.928,46.5 60.1,47.672 60.1,70 ; Q2.1@43.509,92 Q1.3 37.2,88.8 34,85.6 34,80.9 44.9,70 60.1,70 ; v1(53.9,38.7) 53.9,25 62.8,16.1 70.4,16.1 86.6,32.3 86.6,37.255 86.71,37.365 V1.2@86.71,37.915 ; IC1.1 60.21,96.55 60.21,95.986 60.1,95.876 60.1,70
VOUT: "VOLT REG.3" A1.2 C4.1 C5.2 P3.2 V1.1 | length 128
  Top Layer w2: v1(50.5,38.6) v1(50.5,49.3)
  Bottom Layer w2: A1.2 45.5,53 49.2,49.3 v1(50.5,49.3) ; v1(50.5,38.6) 50.371,38.471 50.371,10.672 51.543,9.5 C4.1@79.3,9.5 ; C4.1 85.9,9.3 85.9,23.1 92.07,29.27 92.07,29.7 ; 85.9,9.5 88.5,9.5 92.6,13.6 ; V1.1 89.34,38.887 90.056,38.171 91.771,38.171 94.872,37.42 95,37.4 92.07,34.47 92.07,29.8
VREG: C3.2 K1.4 R2.2 R3.2 ST1.2 | length 151.5
  Top Layer w2: v1(42.4,36.3) v1(42.4,42.1) ; v1(47.5,33.6) v1(56.7,33.6)
  Bottom Layer w2: C3.2 6.3,83.5 6.45,83.35 R2.2 6.45,74.75 12,69.2 12,69.137 12.6,68.537 12.6,63.3 14.85,61.05 19.132,61.05 25.5,54.682 25.5,44.1 27.5,42.1 v1(42.4,42.1) ; 6.45,83.5 6.45,94.328 7.622,95.5 ST1.2 ; v1(42.4,36.3) 44.8,36.3 v1(47.5,33.6) ; v1(56.7,33.6) 56.7,30.3 67.1,19.9 70.2,19.9 81.2,30.9 81.2,34.5 K1.4
pads on no net: P1.2 S1.3 S1.4 S2.3 U1.1 U1.5 U1.8

## Polygon pours and split planes (outlines as drawn)
GND on Bottom Layer "NONET_L-01_P-001" (solid, remove dead copper, pour order 0): 0,100 0.1,99.9 100,99.9 100,0 0,0

## Other copper
Bottom Layer:
  text "FUENTE L200" at 28.5,32.9 h2 r90
  text "PUTALLAZ" at 32.2,26.9 h2 r90
  text "NICOLAS" at 36,24.6 h2 r90

## Silkscreen, mask and mechanical layers (free items; w line width, h text height)
Top Overlay:
  lines w0.254: 0,99.9 100,99.9 100,0 0,0 0,100 ; 17.7,100 17.7,104 ; 32.7,100.1 32.7,104 ; 47.7,100 47.7,104 ; 62.7,100 62.7,104 ; 0,100 80,100 80,120 0,120 0,100
  text "Disipador" at 0.654,117.162 h1.52

## Text inside footprints (layer, text, board x,y; h text height)
C1: Top Overlay "+" at 32.2,50.1 h1.5 r90
C2: Top Overlay "+" at 18.746,78.3 h1.52 r180
C6: Top Overlay "+" at 42.7,47.046 h1.52 r270
C7: Top Overlay "+" at 72.146,93.3 h1.52 r180